# EAGLE board Motor Stepper (EAGLE 9.7.0)

Size 102.02 x 336.72 mm. Coordinates in mm from the lower left corner, seen from the top.
Outline: 0,0 102.02,0 102.02,336.72 0,336.72 0,0
Copper layers (1*16): Top 0.035mm / dielectric 1.5mm / Bottom 0.035mm
Design rules "default": minimum track width 6mil, minimum drill 0.35mm, track to track 6mil, track to pad 6mil, pad to pad 6mil, via to via 6mil, smd to smd 6mil, copper to edge 40mil, drill to drill 6mil, minimum pad ring 10mil, minimum via ring 8mil, stop-mask expansion 4mil, vias tented up to drill 0mil, thermal gap 10mil

## Footprints (pad centres in the part's own frame; a part is rotated, then mirrored left to right if it is on the bottom)
BATTERY-GENERIC = drill 1.118 pad 3.15 octagon: + 2.54,0; - -2.54,0
LEDRD254W60D565H860B = drill 0.981 pad 1.581: 1 -1.27,0; 2 1.27,0
RESAD1016W63L850D250B = drill 0.83 pad 1.43: 1 -5.08,0; 2 5.08,0
78B04ST = drill 0.8: 1 -3.81,-3.81; 2 -1.27,-3.81; 3 1.27,-3.81; 4 3.81,-3.81; 5 3.81,3.81; 6 1.27,3.81; 7 -1.27,3.81; 8 -3.81,3.81

## Placement (x,y rotation side)
BAT2  3V  [BATTERY-GENERIC]  21.67,328.47 270 top
BAT3  3V  [BATTERY-GENERIC]  18.98,262.53 270 top
BAT4  3V  [BATTERY-GENERIC]  14.78,184.52 270 top
BAT5  3V  [BATTERY-GENERIC]  14.94,117.96 270 top
BAT6  3V  [BATTERY-GENERIC]  8.26,48.1 270 top
D2  RED  [LEDRD254W60D565H860B]  75.49,243.72 180 top
D3  RED  [LEDRD254W60D565H860B]  80.57,248.8 180 top
D5  RED  [LEDRD254W60D565H860B]  88.19,248.8 180 top
D6  RED  [LEDRD254W60D565H860B]  93.27,243.72 180 top
D7  RED  [LEDRD254W60D565H860B]  93.27,236.1 180 top
D8  RED  [LEDRD254W60D565H860B]  88.19,231.02 180 top
D9  RED  [LEDRD254W60D565H860B]  80.57,231.02 180 top
D10  RED  [LEDRD254W60D565H860B]  75.49,236.1 180 top
D11  RED  [LEDRD254W60D565H860B]  71.29,158.09 180 top
D12  RED  [LEDRD254W60D565H860B]  71.29,165.71 180 top
D13  RED  [LEDRD254W60D565H860B]  76.37,170.79 180 top
D14  RED  [LEDRD254W60D565H860B]  83.99,170.79 180 top
D15  RED  [LEDRD254W60D565H860B]  89.07,165.71 180 top
D16  RED  [LEDRD254W60D565H860B]  89.07,158.09 180 top
D17  RED  [LEDRD254W60D565H860B]  83.99,153.01 180 top
D18  RED  [LEDRD254W60D565H860B]  76.37,153.01 180 top
D19  RED  [LEDRD254W60D565H860B]  71.45,91.53 180 top
D20  RED  [LEDRD254W60D565H860B]  71.45,99.15 180 top
D21  RED  [LEDRD254W60D565H860B]  76.53,104.23 180 top
D22  RED  [LEDRD254W60D565H860B]  84.15,104.23 180 top
D23  RED  [LEDRD254W60D565H860B]  89.23,99.15 180 top
D24  RED  [LEDRD254W60D565H860B]  89.23,91.53 180 top
D25  RED  [LEDRD254W60D565H860B]  84.15,86.45 180 top
D26  RED  [LEDRD254W60D565H860B]  76.53,86.45 180 top
D27  RED  [LEDRD254W60D565H860B]  64.77,21.67 180 top
D28  RED  [LEDRD254W60D565H860B]  64.77,29.29 180 top
D29  RED  [LEDRD254W60D565H860B]  69.85,34.37 180 top
D30  RED  [LEDRD254W60D565H860B]  77.47,34.37 180 top
D31  RED  [LEDRD254W60D565H860B]  82.55,29.29 180 top
D32  RED  [LEDRD254W60D565H860B]  82.55,21.67 180 top
D33  RED  [LEDRD254W60D565H860B]  77.47,16.59 180 top
D34  RED  [LEDRD254W60D565H860B]  69.85,16.59 180 top
D43  RED  [LEDRD254W60D565H860B]  78.18,309.66 180 top
D44  RED  [LEDRD254W60D565H860B]  83.26,314.74 180 top
D45  RED  [LEDRD254W60D565H860B]  90.88,314.74 180 top
D46  RED  [LEDRD254W60D565H860B]  95.96,309.66 180 top
D47  RED  [LEDRD254W60D565H860B]  95.96,302.04 180 top
D48  RED  [LEDRD254W60D565H860B]  90.88,296.96 180 top
D49  RED  [LEDRD254W60D565H860B]  83.26,296.96 180 top
D50  RED  [LEDRD254W60D565H860B]  78.18,302.04 180 top
R1  1k  [RESAD1016W63L850D250B]  76.91,289.34 90 top
R2  1k  [RESAD1016W63L850D250B]  74.22,223.4 90 top
R3  1k  [RESAD1016W63L850D250B]  74.22,258.96 90 top
R5  1k  [RESAD1016W63L850D250B]  70.02,145.39 90 top
R6  1k  [RESAD1016W63L850D250B]  70.18,78.83 90 top
R7  1k  [RESAD1016W63L850D250B]  63.5,8.97 90 top
R8  1k  [RESAD1016W63L850D250B]  70.02,180.95 90 top
R9  1k  [RESAD1016W63L850D250B]  75.1,180.95 90 top
R10  1k  [RESAD1016W63L850D250B]  70.18,114.39 90 top
R11  1k  [RESAD1016W63L850D250B]  75.26,114.39 90 top
R12  1k  [RESAD1016W63L850D250B]  82.88,114.39 90 top
R15  1k  [RESAD1016W63L850D250B]  68.58,8.97 90 top
R16  1k  [RESAD1016W63L850D250B]  76.2,8.97 90 top
R17  1k  [RESAD1016W63L850D250B]  81.28,8.97 90 top
R18  1k  [RESAD1016W63L850D250B]  81.28,44.53 90 top
R19  1k  [RESAD1016W63L850D250B]  76.2,44.53 90 top
R20  1k  [RESAD1016W63L850D250B]  68.58,44.53 90 top
R21  1k  [RESAD1016W63L850D250B]  63.5,44.53 90 top
SW1  SPST-478B04ST  [78B04ST]  45.16,305.85 0 top
SW2  SPST-478B04ST  [78B04ST]  42.47,239.91 0 top
SW3  SPST-478B04ST  [78B04ST]  38.27,161.9 0 top
SW4  SPST-478B04ST  [78B04ST]  38.43,95.34 0 top
SW5  SPST-478B04ST  [78B04ST]  31.75,25.48 0 top

## Library data of the parts
BAT2-BAT6 R1-R3 R5-R12 R15-R21 SW1-SW5 = Tinkercad
D2 D3 D5-D34 D43-D50 = Tinkercad; CATEGORY: Opto-Electronic; SUB-CATEGORY: LED; VALUE: LED_RED

## Nets
BAT2+: BAT2.+ SW1.5 SW1.6 SW1.7 SW1.8
BAT2-: BAT2.- R1.1
BAT3+: BAT3.+ SW2.5 SW2.6 SW2.7 SW2.8
BAT3-: BAT3.- R2.1 R3.2
BAT4+: BAT4.+ SW3.5 SW3.6 SW3.7 SW3.8
BAT4-: BAT4.- R5.1 R8.2 R9.2
BAT5+: BAT5.+ SW4.5 SW4.6 SW4.7 SW4.8
BAT5-: BAT5.- R6.1 R10.2 R11.2 R12.2
BAT6+: BAT6.+ SW5.5 SW5.6 SW5.7 SW5.8
BAT6-: BAT6.- R7.1 R15.1 R16.1 R17.1 R18.2 R19.2 R20.2 R21.2
D2_C: D2.2 R3.1
D10_C: D10.2 R2.2
D11_C: D11.2 R5.2
D12_C: D12.2 R8.1
D13_C: D13.2 R9.1
D19_C: D19.2 R6.2
D20_C: D20.2 R10.1
D21_C: D21.2 R11.1
D22_C: D22.2 R12.1
D27_C: D27.2 R7.2
D28_C: D28.2 R21.1
D29_C: D29.2 R20.1
D30_C: D30.2 R19.1
D31_C: D31.2 R18.1
D32_C: D32.2 R17.2
D33_C: D33.2 R16.2
D34_C: D34.2 R15.2
D50_C: D50.2 R1.2
SW1_3: D50.1 SW1.3
SW2_3: D10.1 SW2.3
SW2_4: D2.1 SW2.4
SW3_4: D11.1 D12.1 D13.1 SW3.4
SW4_1: D21.1 D22.1 SW4.1
SW4_4: D19.1 D20.1 SW4.4
SW5_2: D28.1 D29.1 D30.1 D31.1 SW5.2
SW5_3: D27.1 D32.1 D33.1 D34.1 SW5.3

## Tracks (layer width: path | path; a pad name or v marks a point on that pad's centre or on a via)
BAT2+  (4 unrouted)
BAT2-  (1 unrouted)
BAT3+  (4 unrouted)
BAT3-  (2 unrouted)
BAT4+  (4 unrouted)
BAT4-  (3 unrouted)
BAT5+  (4 unrouted)
BAT5-  (4 unrouted)
BAT6+  (4 unrouted)
BAT6-  (8 unrouted)
D2_C  (1 unrouted)
D10_C  (1 unrouted)
D11_C  (1 unrouted)
D12_C  (1 unrouted)
D13_C  (1 unrouted)
D19_C  (1 unrouted)
D20_C  (1 unrouted)
D21_C  (1 unrouted)
D22_C  (1 unrouted)
D27_C  (1 unrouted)
D28_C  (1 unrouted)
D29_C  (1 unrouted)
D30_C  (1 unrouted)
D31_C  (1 unrouted)
D32_C  (1 unrouted)
D33_C  (1 unrouted)
D34_C  (1 unrouted)
D50_C  (1 unrouted)
SW1_3  (1 unrouted)
SW2_3  (1 unrouted)
SW2_4  (1 unrouted)
SW3_4  (3 unrouted)
SW4_1  (2 unrouted)
SW4_4  (2 unrouted)
SW5_2  (4 unrouted)
SW5_3  (4 unrouted)